# Altium PCB SmartBuoyLoRa.PcbDoc
Units mil, origin at the board's own origin, x right, y up, seen from the top; angles counter-clockwise.
Board outline 3460 x 3460 mil, 2 copper layers (Top Layer, Bottom Layer); 30 components, 31 nets, 123 pads, 1 vias.
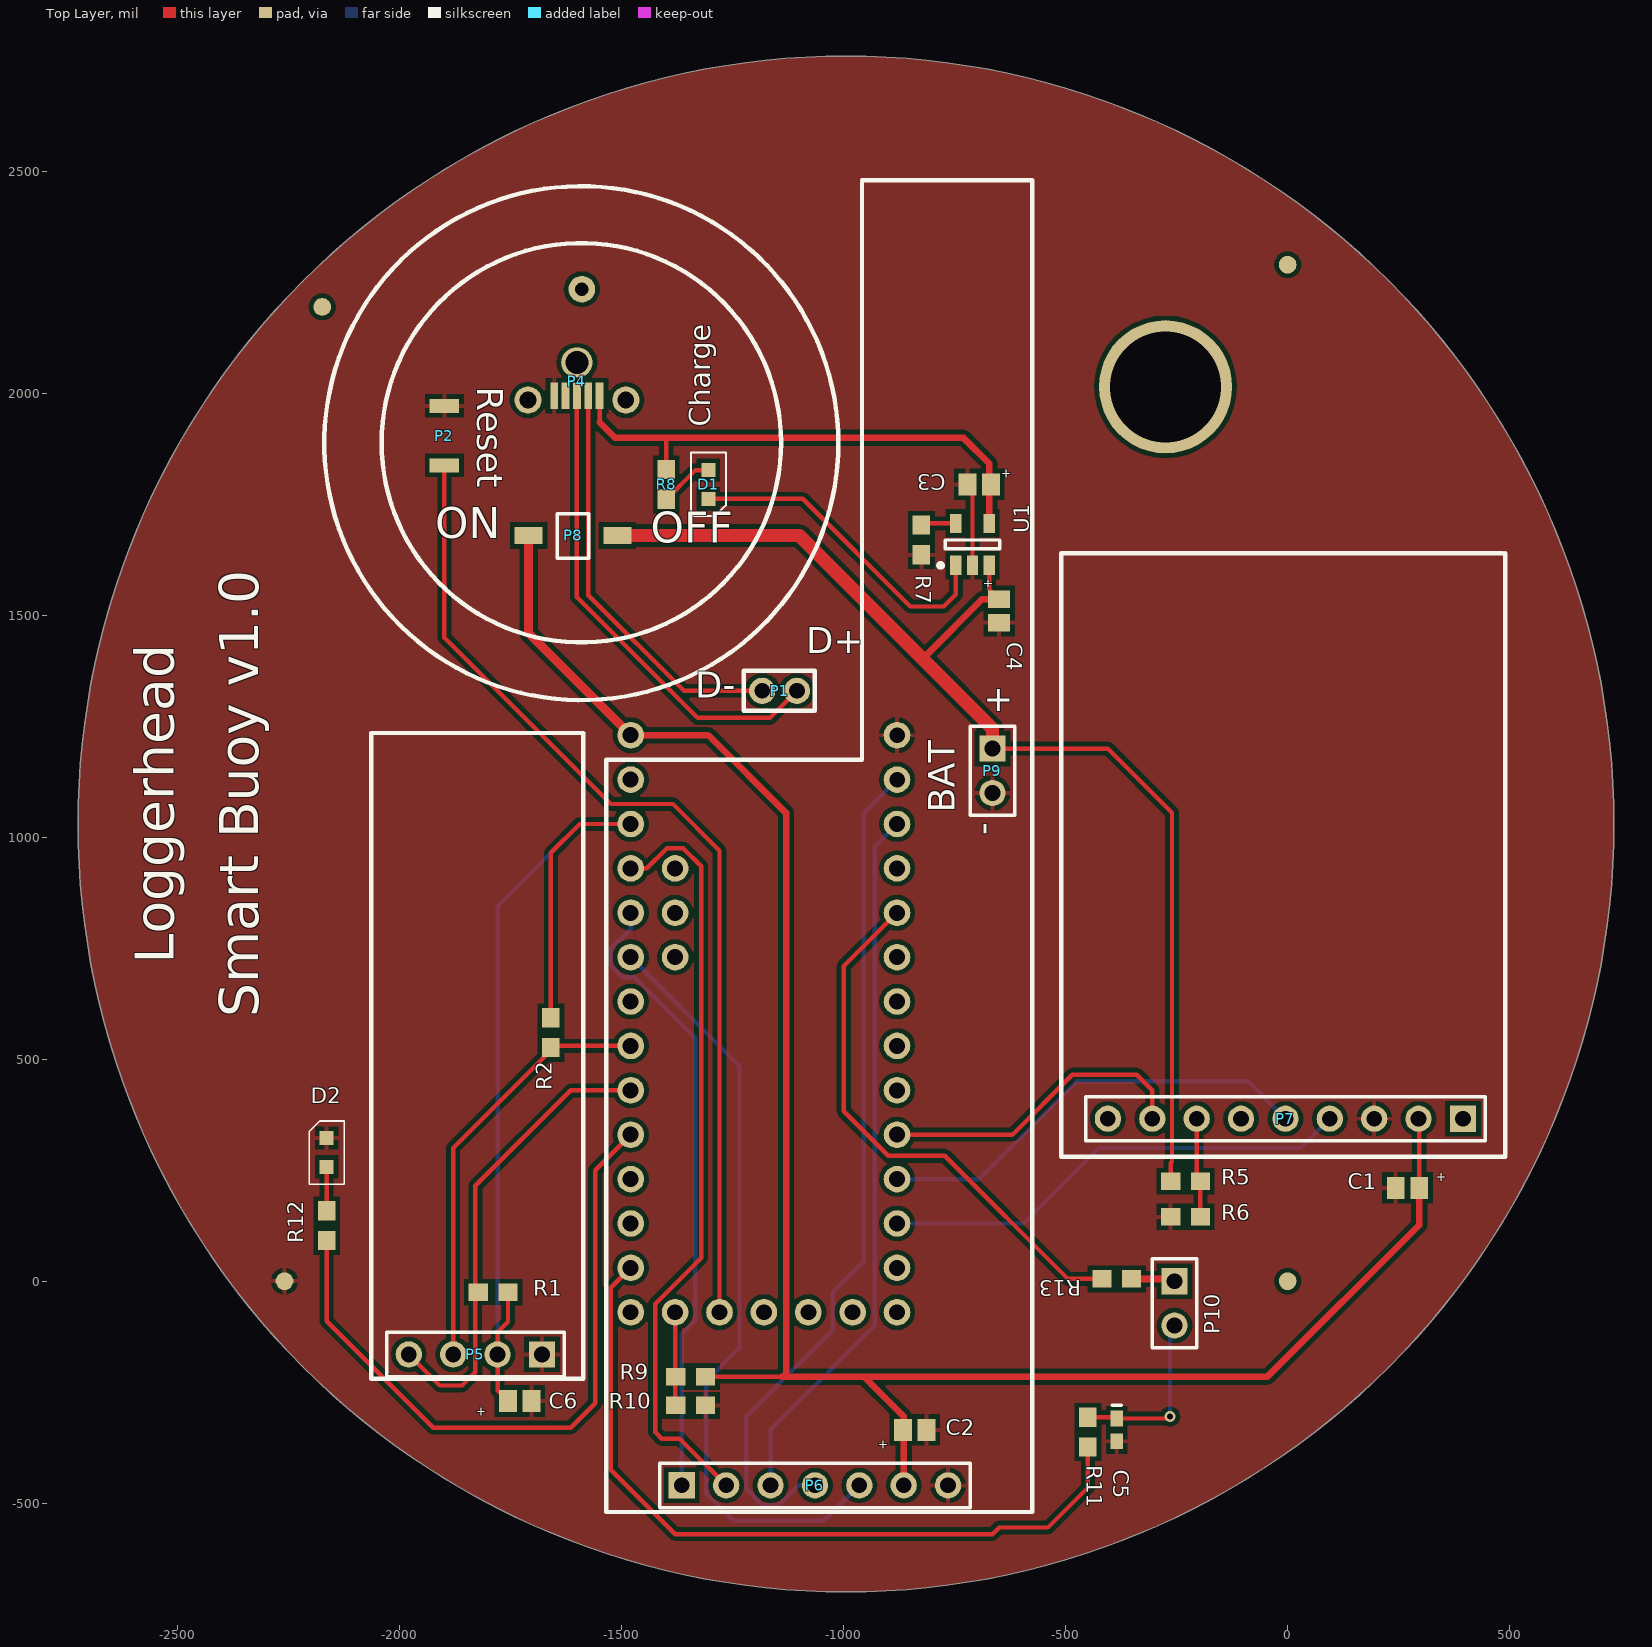
[diagram p0: Top Layer view]
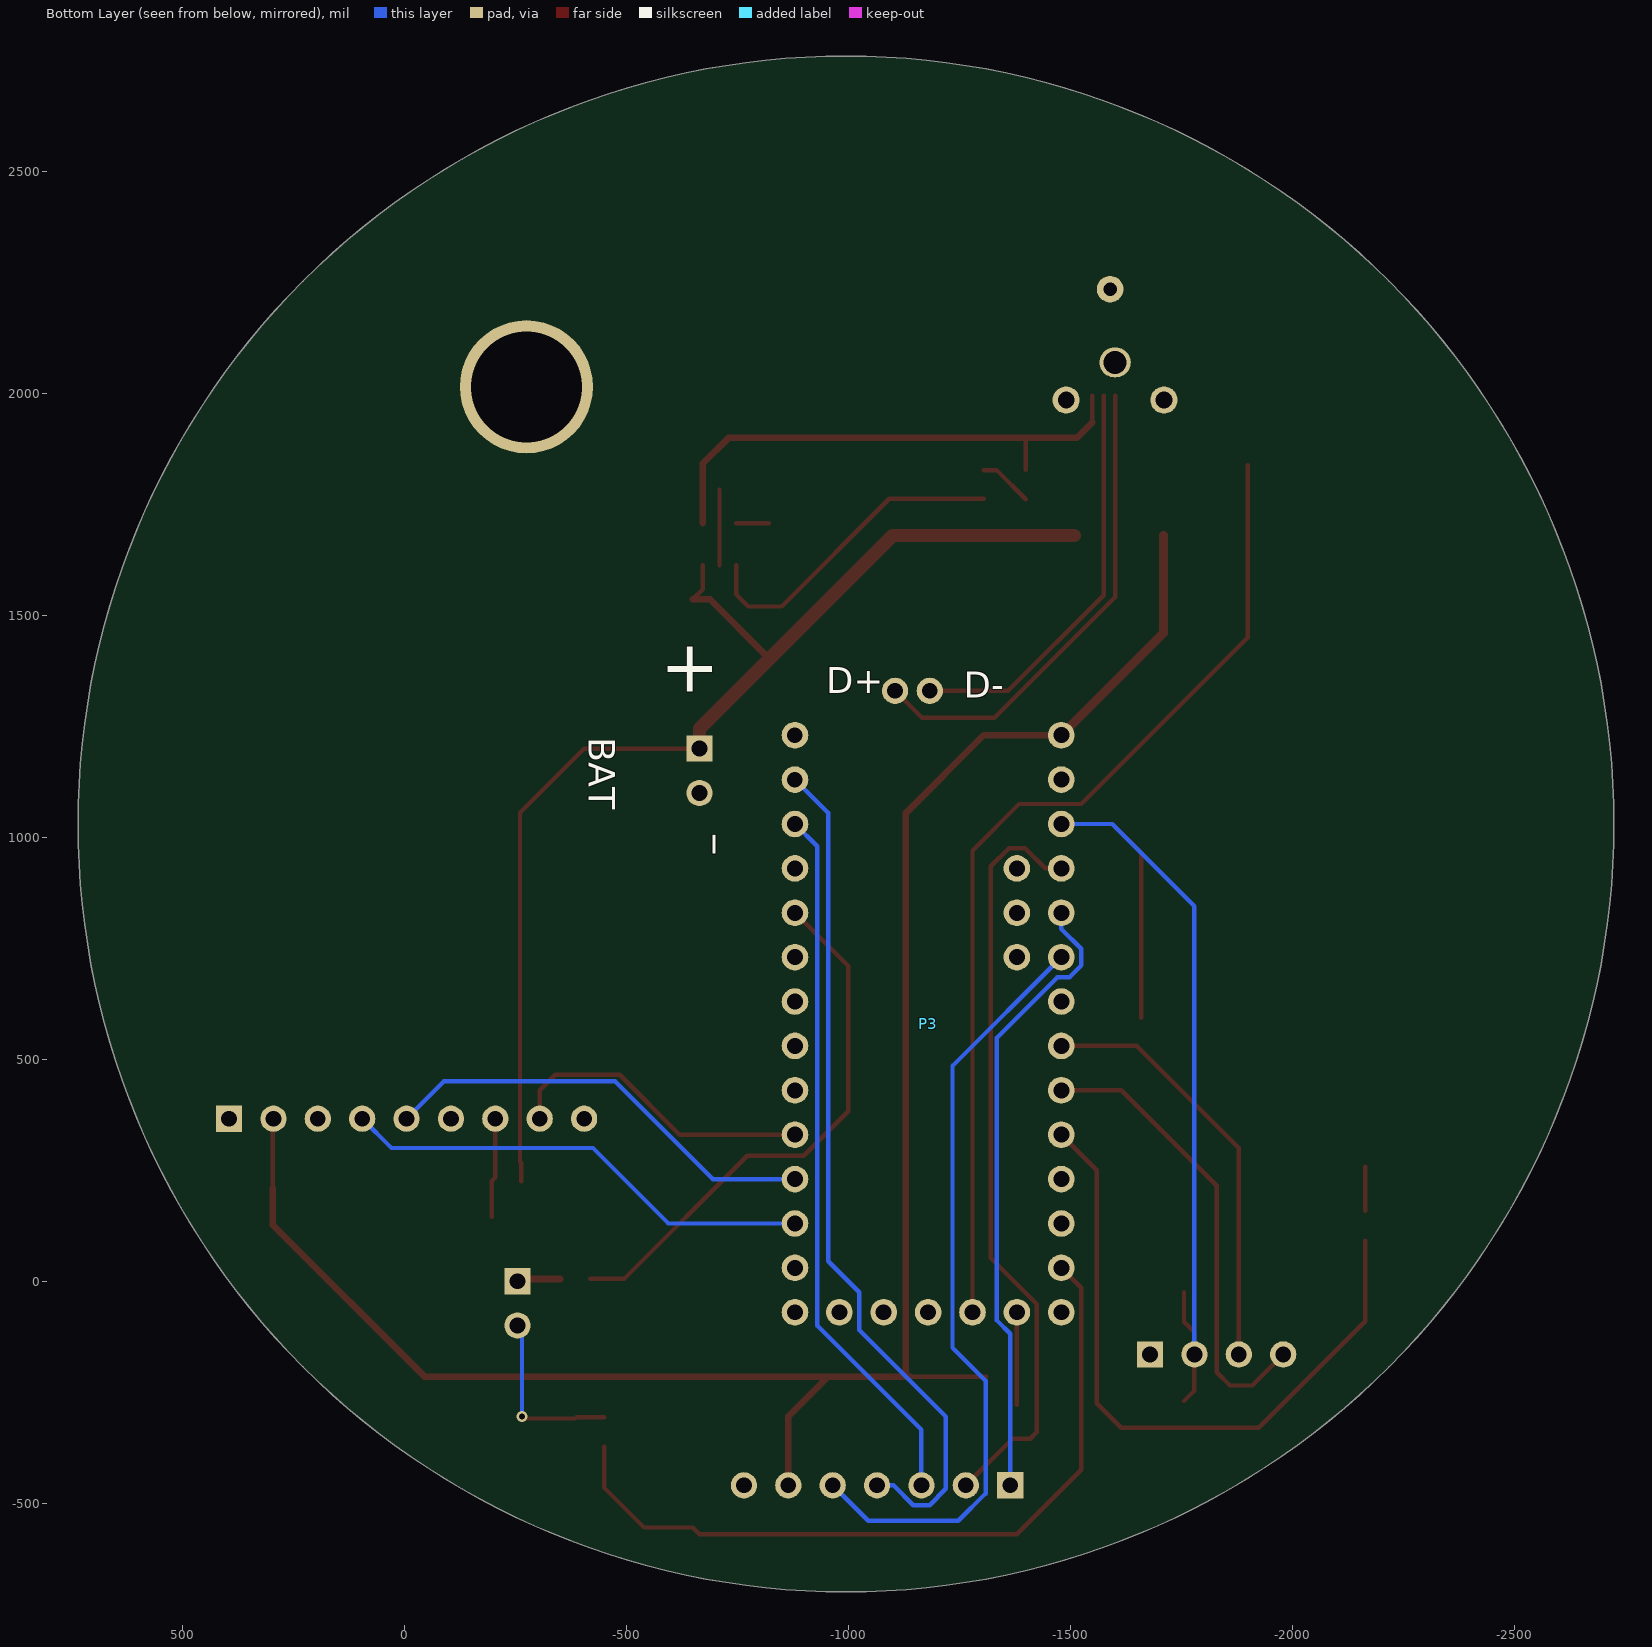
[diagram p1: Bottom Layer view, seen from below]

## Layer stack, top to bottom
Top Solder: solder mask 0.4, Solder Resist, Dk 3.5
Top Layer: signal copper 1.4
Dielectric 1: dielectric 12.6, FR-4, Dk 4.8
Bottom Layer: signal copper 1.4
Bottom Solder: solder mask 0.4, Solder Resist, Dk 3.5

## Board outline
-2725,1030 ccw(c-995,1030) -995,-700 ccw(c-995,1030) 735,1030 ccw(c-995,1030) -995,2760 ccw(c-995,1030)

## Design rules (kind name [scope] priority, off if disabled: settings)
Clearance [All] p1: gap=10
PolygonConnect [All] p1: connectstyle=Relief reliefconductorwidth=10 reliefentries=4 polygonreliefangle="90 Angle" airgapwidth=10
RoutingVias [All] p1: holewidth=28 width=50 viastyle="Through Hole" minholewidth=28 minwidth=50 maxholewidth=28 maxwidth=50
SolderMaskExpansion [All] p1: expansion=4
Width [All] p1: maxlimit=100 minlimit=10 preferedwidth=10
29 further rules are at their usual default settings.

## Components (designator, comment, footprint, x,y, rotation, side; value= is the part's Value field where it differs from the comment)
C1 "1uF" Tant0805 270,210 r0 top
C2 "1uF" Tant0805 -840,-335 r180 top
C3 "1uF" Tant0805 -695,1795 r0 top
C4 "1uF" Tant0805 -650,1510 r90 top
C5 "1.0uF" 0402 -385,-335 r270 top
C6 "1uF" Tant0805 -1730,-270 r180 top
D1 "LED_0603" Diode0603 -1305,1795 r270 top
D2 "LED_0603" Diode0603 -2165,290 r90 top
P1 "USB" HDR_2x1_2mm -1105,1330 r90 top
P2 "Tactile" Tactile-B3U-1000 -1900,1905 r270 top
P3 "Teensy3.x" Teensy3.x -880,1030 r0 bottom
P4 "microUSB-vert" MICROUSB-VERT -1550,1995 r180 top
P5 "Display" HDR1X4 -1680,-165 r180 top
P6 "LoRa" HDR1X7 -1365,-460 r0 top
P7 "GPS" HDR1X9 395,366 r180 top
P8 "DIP1" DIP1 -1510,1680 r180 top
P9 "Header 2" HDR1X2 -665,1200 r270 top
P10 "Salt Switch" HDR1X2 -255,0 r270 top
R1 "4.7k" 3-0603 -1790,-25 r180 top
R2 "4.7k" 3-0603 -1660,560 r90 top
R5 "33k" 3-0603 -230,225 r180 top
R6 "100k" 3-0603 -230,145 r0 top
R7 "2k" 3-0603 -825,1670 r90 top
R8 "330" 3-0603 -1400,1795 r270 top
R9 "100k" 3-0603 -1345,-215 r0 top
R10 "100k" 3-0603 -1345,-280 r180 top
R11 "10k" 3-0603 -450,-340 r90 top
R12 "330" 3-0603 -2165,125 r90 top
R13 "1k" 3-0603 -385,5 r180 top
U1 "MCP73831T-2DCI/OT" SOT-23-OT5_N -710,1660 r90 top

## Footprints (in the part's own frame and the unit in brackets; to place one, negate y for a bottom-side part, rotate by r counter-clockwise, add the part's x,y. Pads: shape width x height; smd on the part's side, far side on the other; paste and mask are expansions set on the pad)
3-0603 [mm] "Chip Resistor; Body 1.6 x 0.9 mm (LxW typ)"
  rect 1.1x1 smd: 1(-0.85,0) 2(0.85,0)
0402 [mm] "Chip Capacitor; Body 1.0 x 0.5 mm (LxW typ)"
  rect 0.9x0.7 smd: 1(-0.65,0) 2(0.65,0)
  silkscreen extent -1.4,-0.25 -1.4,0.25
Diode0603 [mm]
  rect 0.8x0.8 smd: A(-0.825,0) K(0.825,0)
  silkscreen extent -1.83,-1 1.8,1
DIP1 [mm]
  rect 1.6x1 smd: 1(0,0) 2(5.08,0)
  silkscreen extent 1.63,-1.25 3.45,1.29
HDR1X2 [mm] "Connector; Header; 2 Position"
  rect 1.5x1.5 hole 0.9: 1(0,0)
  round 1.5 hole 0.9: 2(2.54,0)
  silkscreen extent -1.27,-1.27 3.81,1.27
HDR1X4 [mm] "Connector; Header; 4 Position"
  rect 1.5x1.5 hole 0.9: 1(0,0)
  round 1.5 hole 0.9: 2(2.54,0) 3(5.08,0) 4(7.62,0)
  silkscreen extent -1.27,-1.27 8.89,1.27
HDR1X7 [mm] "Connector; Header; 7 Position"
  rect 1.5x1.5 hole 0.9: 1(0,0)
  round 1.5 hole 0.9: 2(2.54,0) 3(5.08,0) 4(7.62,0) 5(10.16,0) 6(12.7,0) 7(15.24,0)
  silkscreen extent -1.27,-1.27 16.51,1.27
HDR1X9 [mm] "Connector; Header; 9 Position"
  rect 1.5x1.5 hole 0.9: 1(0,0)
  round 1.5 hole 0.9: 2(2.54,0) 3(5.08,0) 4(7.62,0) 5(10.16,0) 6(12.7,0) 7(15.24,0) 8(17.78,0) 9(20.32,0)
  silkscreen extent -1.27,-1.27 21.59,1.27
HDR_2x1_2mm [mm]
  round 1.5 hole 0.9: 1(0,0.016) 2(0,2)
  silkscreen extent -1.14,-1.02 1.14,3.05
MICROUSB-VERT [mm] "Molex 05133-0011"
  rect 0.45x1.5 smd: 1(0,0) 2(0.65,0) 3(1.3,0) 4(1.95,0) 5(2.6,0)
  round 1.55 hole 0.95: ""(-1.5,0.25) ""(4.1,0.25)
  oval 1.8x1.7 hole 1.3: ""(1.3,-1.9)
  body extent -2.67,-3.05 5.35,1.4, height 7.53
SOT-23-OT5_N [mm] "SOT23, 5-Leads, Body 2.9x1.7mm, Pitch 0.95mm, Lead Span 2.8mm, IPC Medium Density"
  rect 1.1x0.65 smd: 1(-1.2,0.95) 2(-1.2,0) 3(-1.2,-0.95) 4(1.2,-0.95) 5(1.2,0.95)
  silkscreen extent -1.32,-1.55 0.25,1.95, body extent -0.9,-1.55 0.9,1.55, height 1.45
Tactile-B3U-1000 [mm]
  rect 0.8x1.7 smd: 1(-1.7,0) 2(1.7,0)
Tant0805 [mil]
  rect 40x50 smd: 1(-26.5,0) 2(26.5,0)
Teensy3.x [mil]
  round 60 hole 35: 0(0,-100) GND(0,-200)
  round 60 hole 36: 1(0,0) 2(0,100) 3(0,200) 3.3V2(-200,1100) 4(0,300) 5(0,400) 6(0,500) 7(0,600) 8(0,700) 9(0,800) 10(0,900) 11(0,1000) 12(0,1100) 13(-600,1100) 14(-600,1000) 15(-600,900) 16(-600,800) 17(-600,700) 18(-600,600) 19(-600,500) 20(-600,400) 21(-600,300) 22(-600,200) 23(-600,100) A10(-500,200) A11(-500,300) A14(-500,1100) AGND(-600,-100) AREF(-500,100) GND2(-300,1100) PGM(-400,1100) VBat(-100,1100) Vin(-600,-200)
  round 60 hole 36 paste+0: 3.3V(-600,0)

## Part data
C1 C2 C3 C4 C6: library part Tant0805
C5: library part C0402, "Ceramic Chip Capacitor - Standard"
P1: library part HDR_2x1_2mm, "Charging Connector"
P2: library part Tactile_B3U-1000
P4: "Molex 105133-0011"
P5: library part "Header 4", "Header, 4-Pin"
P6: library part "Header 7", "Header, 7-Pin"
P7: library part "Header 9", "Header, 9-Pin"
P9: "Header, 2-Pin"
P10: library part "Header 2", "Header, 2-Pin"
R1 R2 R5 R6 R7 R8 R9 R10 R11 R12 R13: library part ERJ3RK, "Precision Thick Film Chip Resistor, 10 Ohm to 1M Ohm Range, 1% and 0.5% Tolerance, 0603 Size, 0.063 W"
U1: "Miniature Single-Cell, Fully Integrated Li-Ion, Li-Polymer Charge Management Controller, 4.2V, 5-Pin SOT-23, Industrial Temperature, Tape and Reel"

## Free pads (board coordinates)
  round 40 smd paste-20 mask+5: 0(-2260,0) 0(-2175,2195) 0(0,0) 0(0,2290)
  round 300 hole 250: 1(-275,2015)
  round 60 hole 30: 2(-1590,2235)

## Via types
v1: diameter 25, hole 14, Top Layer to Bottom Layer, tented both sides, 1 vias

## Nets (pads, with @x,y where several pads share a name; then routed paths per layer and width w, separated by ;. In a path a pad name is that pad's centre, name@x,y a point inside that pad or via, vN(x,y) a via of type N, cw(c..) or ccw(c..) an arc to the next point about the centre after c; other vN are vias at no path point)
AUX: P3.21 P6.5 | length 1744
  Bottom Layer w10: P3.21 -1235,485 -1235,-150 -1309.53,-224.53 -1309.53,-478.44 -1247.97,-540 -1045,-540 P6.5
D15: P3.15
D+: P1.1 P4.3 | length 1087.1
  Top Layer w10: P4.3 -1601.18,1541.18 -1329.37,1269.37 -1166.26,1269.37 P1.1
D-: P1.2 P4.2 | length 930.6
  Top Layer w10: P4.2 -1575.59,1545.59 -1360,1330 P1.2
DGND: C1.1 C2.1 C3.1 C4.1 C5.2 C6.1 D2.K P2.1 P3.GND P4.5 P5.1 P6.7 P7.3 P9.2 pad.0@-2260,0 R6.1 R7.1 R10.1 U1.2 | length 170.7
  Top Layer w10: U1.2 C3.1@-710,1783.5
GPSBAT: P7.7 R5.1 R6.2 | length 224.5
  Top Layer w10: P7.7 -205,233.46 R5.1 R6.2
GPSEN: P3.8 P7.8 | length 709.4
  Top Layer w10: P3.8 -620,330 -485,465 -340,465 -305,430 P7.8
LED1: P3.17 R12.1 | length 1546.9
  Top Layer w10: R12.1 -2165,-90 -1925,-330 -1615,-330 -1560,-275 -1560,250 P3.17
M0: P3.22 P6.1 | length 1415.7
  Bottom Layer w10: P3.22 -1480,793.64 -1525,748.64 -1525,711.36 -1498.64,685 -1471.36,685 -1335,548.64 -1335,-88.64 -1365,-118.64 P6.1
M1: P3.23 P6.2 | length 1721.5
  Top Layer w10: P3.23 -1443.64,930 -1398.64,975 -1361.36,975 -1321.36,935 -1321.36,52.28 -1425,-51.36 -1425,-340 -1410,-355 -1370,-355 P6.2
NetC5_1: C5.1 P10.2 R11.2 | length 379
  Top Layer w10: R11.2 C5.1@-387.87,-306.54 ; C5.1 -269.41,-309.41 v1(-265,-305)
  Bottom Layer w10: v1(-265,-305) P10.2@-265,-110
NetD1_A: D1.A R8.2 | length 122.3
  Top Layer w10: R8.2 -1334.06,1827.48 D1.A
NetD1_K: D1.K U1.1 | length 734.6
  Top Layer w10: D1.K -1092.52,1762.52 -850,1520 -775,1520 -747.4,1547.6 U1.1
NetD2_A: D2.A R12.2 | length 99.1
  Top Layer w10: R12.2 D2.A
NetP10_1: P10.1 R13.1 | length 91.5
  Top Layer w15: R13.1 P10.1@-260,5
NetR7_2: R7.2 U1.5 | length 73.8
  Top Layer w10: R7.2@-821.22,1707.24 U1.5
PGM: P2.2 P3.PGM | length 2246.9
  Top Layer w10: P2.2 -1900,1450 -1525,1075 -1385,1075 -1280,970 P3.PGM
PPS: P7.1
RX: P3.0 P6.4 | length 1927.4
  Bottom Layer w10: P6.4 -1102.03,-460 -1146.56,-504.53 -1183.44,-504.53 -1220,-467.97 -1220,-305 -1025,-110 -1025,-25 -955,45 -955,1055 P3.0
RXD2: P3.9 P7.5 | length 1000.9
  Bottom Layer w10: P3.9 -695,230 -475,450 -89,450 P7.5
SALT_READ: P3.14 R11.1 | length 1743.7
  Top Layer w10: P3.14 -1525,-15 -1525,-425 -1380,-570 -665,-570 -650,-555 -540,-555 -450,-465 R11.1
SALT_SIG: P3.3 R13.2 | length 1234.9
  Top Layer w10: P3.3 -1000,710 -1000,382.82 -899.68,282.5 -772.5,282.5 -495,5 R13.2
SCL: P3.19 P5.3 R2.1 | length 960.3
  Top Layer w10: P5.3 -1880,145 -1880,300 -1650,530 P3.19
SDA: P3.18 P5.4 R1.2 | length 1050.5
  Top Layer w10: P5.4 -1910,-235 -1860,-235 -1830,-205 -1830,215 -1615,430 P3.18
TX: P3.1 P6.3 | length 1608.1
  Bottom Layer w10: P6.3 -1165,-335 -930,-100 -930,980 P3.1
TXD2: P3.10 P7.4 | length 1072.8
  Bottom Layer w10: P3.10 -595,130 -425,300 29,300 P7.4
V_BATT: C4.2 P8.1 P9.1 R5.2 U1.3 | length 2674.3
  Top Layer w10: -815,1405 -815,1410 ; U1.3 -672.6,1559.1 C4.2 ; P9.1 -405,1200 -260.47,1055.47 -260.47,269.53 -263.46,266.54 R5.2
  Top Layer w15: -815,1410 -688.5,1536.5 C4.2
  Top Layer w30: P8.1 -1100,1680 -665,1245 P9.1
VCC: C6.2 P3.3.3V P5.2 R1.1 R2.2 | length 2229.5
  Top Layer w10: R1.1 -1756.54,-91.54 -1780,-115 P5.2 -1780,-246.5 C6.2 ; R2.2 -1660,965 -1595,1030 P3.3.3V
  Bottom Layer w10: P5.2 -1780,845 -1595,1030 P3.3.3V
VIN: C1.2 C2.2 P3.Vin P6.6 P7.2 P8.2 R9.2 | length 4511.7
  Top Layer w10: R9.2 -1140,-215 -1130,-205 ; C1.2 P7.2@296.5,364.5
  Top Layer w15: P3.Vin -1305,1230 -1130,1055 -1130,-205 ; -1140,-215 -955,-215 ; P6.6 -865,-305 -955,-215 ; C1.2 296.5,126.5 -45,-215 -955,-215
  Top Layer w20: P8.2 -1710,1460 P3.Vin
VSENS: P3.A14 R9.1 R10.2 | length 208.5
  Top Layer w10: R10.2@-1380,-278.46 P3.A14
XVUSB: C3.2 P4.1 R8.1 U1.4 | length 1177.6
  Top Layer w10: -1550,1935 P4.1 ; R8.1 -1400,1895
  Top Layer w15: -1550,1935 -1515,1900 -730,1900 -672.6,1842.6 U1.4
pads on no net: P3.2 P3.3.3V2 P3.4 P3.5 P3.6 P3.7 P3.11 P3.12 P3.13 P3.16 P3.20 P3.A10 P3.A11 P3.AGND P3.AREF P3.GND2 P3.VBat P4. P4.4 P7.6 P7.9

## Polygon pours and split planes (outlines as drawn)
DGND on Top Layer "V1.8" (solid, pour order 4): -2725,1030 ccw(c-995,1030) -995,-700 ccw(c-995,1030) 735,1030 ccw(c-995,1030) -995,2760 ccw(c-995,1030)

## Silkscreen, mask and mechanical layers (free items; w line width, h text height)
Top Overlay:
  circle w10: c-1591.3,1888 r579
  circle w10: c-1591.3,1889 r450
  lines w10: -959,2476 -959,1175 -1535,1175 -1535,-520 -575,-520 -575,2480 -959,2480 ; 485,1640 -510,1640 -510,280 490,280 ; 490,285 490,1640 ; -2065,-220 -2065,1235 -1586.97,1235 -1586.97,-220 -1590,-220 -2065,-220
  text "Reset" at -1845,2015 h100 r270
  text "Charge" at -1285,1925 h80 r90
  text "ON" at -1920,1650 h120
  text "OFF" at -1435,1640 h120
  text "D+" at -1085,1395 h100
  text "D-" at -1335,1295 h100
  text "+" at -685,1265 h100
  text "BAT" at -750,1055 h60 r90
  text "-" at -640,1005 h100 r90
  text "Loggerhead" at -2480,715 h150 r90
  text "Smart Buoy v1.0" at -2290,595 h150 r90
Bottom Overlay:
  text "D+" at -950,1305 h100
  text "D-" at -1260,1295 h100
  text "+" at -710,1290 h200
  text "BAT" at -415,1225 h60 r90
  text "-" at -620,955 h200 r90
Mechanical 1:
  circle w10: c-995,1030 r1730

## Text inside footprints (layer, text, board x,y; h text height)
C1: Top Overlay "+" at 335,225 h19.68
C2: Top Overlay "+" at -900,-360 h19.68 r180
C3: Top Overlay "+" at -645,1810 h19.68
C4: Top Overlay "+" at -665,1560 h19.68 r90
C6: Top Overlay "+" at -1805,-285 h19.68 r180